# EAGLE board sd2snes20 (EAGLE 4.15)
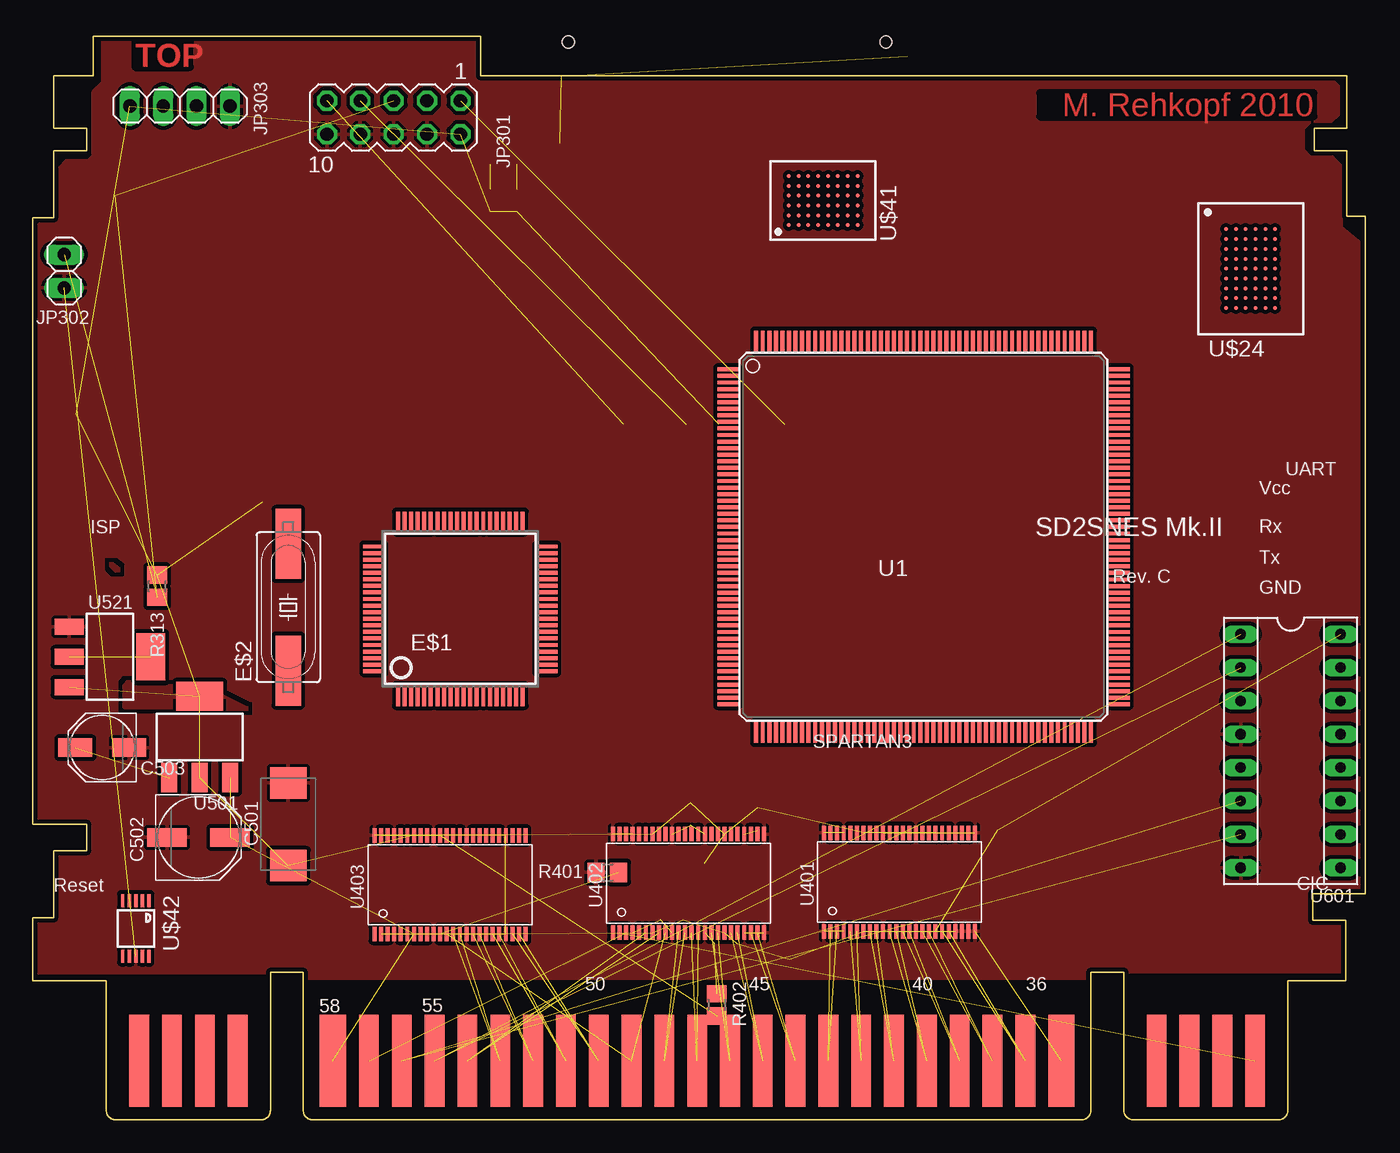
[diagram p0: board, top side]
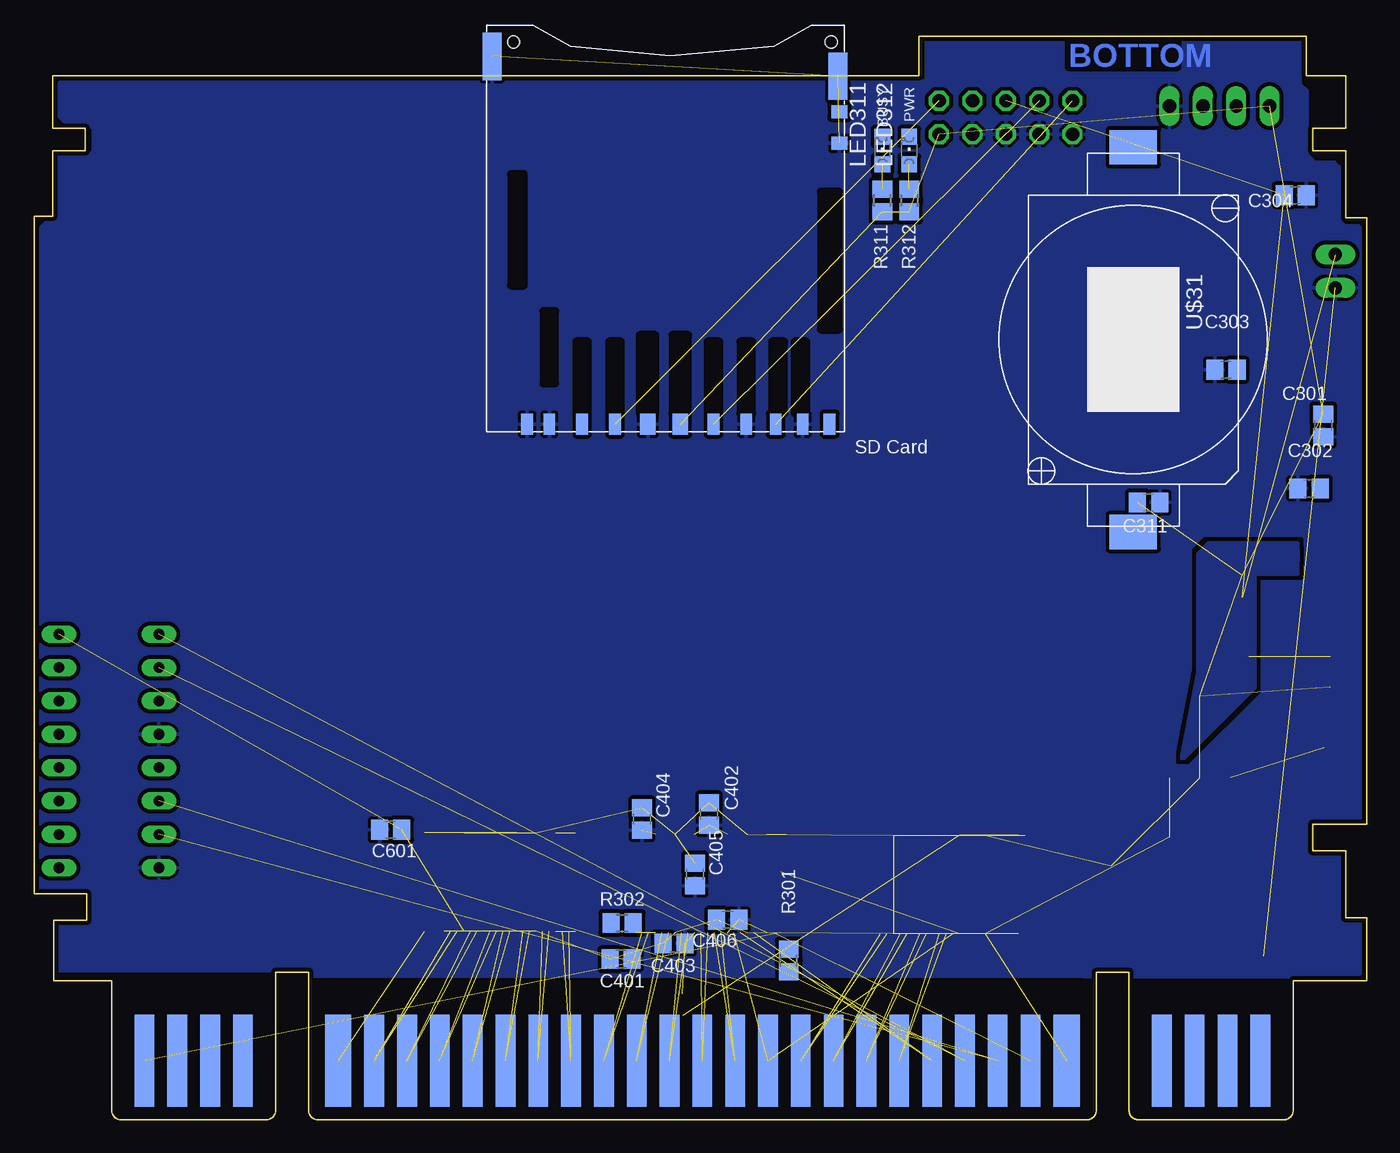
[diagram p1: board, bottom side, seen from below]

Size 101.5 x 82.5 mm. Coordinates in mm from the lower left corner, seen from the top.
Copper layers (1*16): Top 0.035mm / dielectric 1mm / Bottom 0.035mm
Design rules "myBilex DRU": minimum track width 0.1mm, minimum drill 0.1mm, track to track 0.1mm, track to pad 0.1mm, pad to pad 0.1mm, via to via 0.1mm, smd to smd 0.1mm, copper to edge 10mil, drill to drill 8mil, minimum pad ring 10mil, minimum via ring 0.1mm, stop-mask expansion 4mil, vias tented up to drill 0mil, thermal gap 10mil

## Footprints (pad centres in the part's own frame; a part is rotated, then mirrored left to right if it is on the bottom)
C0805 = smd 1.3 x 1.5: 1 -0.85,0; 2 0.85,0
SMC_D = smd 2.4 x 2.8: + -3.15,0; - 3.15,0
PANASONIC_D = smd 3 x 1.4: + 2.4,0; - -2.4,0
PANASONIC_C = smd 2.6 x 1.4: + 2.05,0; - -2.05,0
SQFP-S-12X12-80 = smd 0.3 x 1.6: 1 -4.75,-6.6; 2 -4.25,-6.6; 3 -3.75,-6.6; 4 -3.25,-6.6; 5 -2.75,-6.6; 6 -2.25,-6.6; 7 -1.75,-6.6; 8 -1.25,-6.6; 9 -0.75,-6.6; 10 -0.25,-6.6; 11 0.25,-6.6; 12 0.75,-6.6; 13 1.25,-6.6; 14 1.75,-6.6; 15 2.25,-6.6; 16 2.75,-6.6; 17 3.25,-6.6; 18 3.75,-6.6; 19 4.25,-6.6; 20 4.75,-6.6; 41 4.75,6.6; 42 4.25,6.6; 43 3.75,6.6; 44 3.25,6.6; 45 2.75,6.6; 46 2.25,6.6; 47 1.75,6.6; 48 1.25,6.6; 49 0.75,6.6; 50 0.25,6.6; 51 -0.25,6.6; 52 -0.75,6.6; 53 -1.25,6.6; 54 -1.75,6.6; 55 -2.25,6.6; 56 -2.75,6.6; 57 -3.25,6.6; 58 -3.75,6.6; 59 -4.25,6.6; 60 -4.75,6.6 | smd 1.6 x 0.3: 21 6.6,-4.75; 22 6.6,-4.25; 23 6.6,-3.75; 24 6.6,-3.25; 25 6.6,-2.75; 26 6.6,-2.25; 27 6.6,-1.75; 28 6.6,-1.25; 29 6.6,-0.75; 30 6.6,-0.25; 31 6.6,0.25; 32 6.6,0.75; 33 6.6,1.25; 34 6.6,1.75; 35 6.6,2.25; 36 6.6,2.75; 37 6.6,3.25; 38 6.6,3.75; 39 6.6,4.25; 40 6.6,4.75; 61 -6.6,4.75; 62 -6.6,4.25; 63 -6.6,3.75; 64 -6.6,3.25; 65 -6.6,2.75; 66 -6.6,2.25; 67 -6.6,1.75; 68 -6.6,1.25; 69 -6.6,0.75; 70 -6.6,0.25; 71 -6.6,-0.25; 72 -6.6,-0.75; 73 -6.6,-1.25; 74 -6.6,-1.75; 75 -6.6,-2.25; 76 -6.6,-2.75; 77 -6.6,-3.25; 78 -6.6,-3.75; 79 -6.6,-4.25; 80 -6.6,-4.75
HC49UP = smd 5.334 x 1.93: 1 -4.826,0; 2 4.826,0
JAE-SG5S009V1A = smd 0.9 x 1.6: 1 6.875,14.44; 2 4.375,14.44; 5 -3.125,14.44; 6 -5.625,14.44; 7 -7.875,14.44; 8 -9.925,14.44; 9 9.375,14.44; CARD_DET1 -11.975,14.44; CARD_DET2 11.075,14.44 | smd 1.2 x 1.6: 3 1.875,14.44; 4 -0.6,14.44 | smd 1.45 x 3.6: GND -12.625,-12.06; GND@1 13.725,-13.56 | smd 1.25 x 1: WP_1 -12.725,-9.36; WP_2 -12.725,-6.96 | hole 0.9: -12.1,-14.66; 12.1,-14.66
MA05-2 = drill 1.016 octagon: 1 -5.08,-1.27; 2 -5.08,1.27; 3 -2.54,-1.27; 4 -2.54,1.27; 5 0,-1.27; 6 0,1.27; 7 2.54,-1.27; 8 2.54,1.27; 9 5.08,-1.27; 10 5.08,1.27
1X02 = drill 1.016 long: 1 -1.27,0; 2 1.27,0
1X04 = drill 1.016 long: 1 -3.81,0; 2 -1.27,0; 3 1.27,0; 4 3.81,0
CHIPLED_0805 = smd 1.2 x 1.2: A 0,-1.05; C 0,1.05
R0805 = smd 1.3 x 1.5: 1 -0.85,0; 2 0.85,0
PQ208 = smd 1.6 x 0.3: P1 -14.9,12.75; P2 -14.9,12.25; P3 -14.9,11.75; P4 -14.9,11.25; P5 -14.9,10.75; P6 -14.9,10.25; P7 -14.9,9.75; P8 -14.9,9.25; P9 -14.9,8.75; P10 -14.9,8.25; P11 -14.9,7.75; P12 -14.9,7.25; P13 -14.9,6.75; P14 -14.9,6.25; P15 -14.9,5.75; P16 -14.9,5.25; P17 -14.9,4.75; P18 -14.9,4.25; P19 -14.9,3.75; P20 -14.9,3.25; P21 -14.9,2.75; P22 -14.9,2.25; P23 -14.9,1.75; P24 -14.9,1.25; P25 -14.9,0.75; P26 -14.9,0.25; P27 -14.9,-0.25; P28 -14.9,-0.75; P29 -14.9,-1.25; P30 -14.9,-1.75; P31 -14.9,-2.25; P32 -14.9,-2.75; P33 -14.9,-3.25; P34 -14.9,-3.75; P35 -14.9,-4.25; P36 -14.9,-4.75; P37 -14.9,-5.25; P38 -14.9,-5.75; P39 -14.9,-6.25; P40 -14.9,-6.75; P41 -14.9,-7.25; P42 -14.9,-7.75; P43 -14.9,-8.25; P44 -14.9,-8.75; P45 -14.9,-9.25; P46 -14.9,-9.75; P47 -14.9,-10.25; P48 -14.9,-10.75; P49 -14.9,-11.25; P50 -14.9,-11.75; P51 -14.9,-12.25; P52 -14.9,-12.75; P105 14.9,-12.75; P106 14.9,-12.25; P107 14.9,-11.75; P108 14.9,-11.25; P109 14.9,-10.75; P110 14.9,-10.25; P111 14.9,-9.75; P112 14.9,-9.25; P113 14.9,-8.75; P114 14.9,-8.25; P115 14.9,-7.75; P116 14.9,-7.25; P117 14.9,-6.75; P118 14.9,-6.25; P119 14.9,-5.75; P120 14.9,-5.25; P121 14.9,-4.75; P122 14.9,-4.25; P123 14.9,-3.75; P124 14.9,-3.25; P125 14.9,-2.75; P126 14.9,-2.25; P127 14.9,-1.75; P128 14.9,-1.25; P129 14.9,-0.75; P130 14.9,-0.25; P131 14.9,0.25; P132 14.9,0.75; P133 14.9,1.25; P134 14.9,1.75; P135 14.9,2.25; P136 14.9,2.75; P137 14.9,3.25; P138 14.9,3.75; P139 14.9,4.25; P140 14.9,4.75; P141 14.9,5.25; P142 14.9,5.75; P143 14.9,6.25; P144 14.9,6.75; P145 14.9,7.25; P146 14.9,7.75; P147 14.9,8.25; P148 14.9,8.75; P149 14.9,9.25; P150 14.9,9.75; P151 14.9,10.25; P152 14.9,10.75; P153 14.9,11.25; P154 14.9,11.75; P155 14.9,12.25; P156 14.9,12.75 | smd 0.3 x 1.6: P53 -12.75,-14.9; P54 -12.25,-14.9; P55 -11.75,-14.9; P56 -11.25,-14.9; P57 -10.75,-14.9; P58 -10.25,-14.9; P59 -9.75,-14.9; P60 -9.25,-14.9; P61 -8.75,-14.9; P62 -8.25,-14.9; P63 -7.75,-14.9; P64 -7.25,-14.9; P65 -6.75,-14.9; P66 -6.25,-14.9; P67 -5.75,-14.9; P68 -5.25,-14.9; P69 -4.75,-14.9; P70 -4.25,-14.9; P71 -3.75,-14.9; P72 -3.25,-14.9; P73 -2.75,-14.9; P74 -2.25,-14.9; P75 -1.75,-14.9; P76 -1.25,-14.9; P77 -0.75,-14.9; P78 -0.25,-14.9; P79 0.25,-14.9; P80 0.75,-14.9; P81 1.25,-14.9; P82 1.75,-14.9; P83 2.25,-14.9; P84 2.75,-14.9; P85 3.25,-14.9; P86 3.75,-14.9; P87 4.25,-14.9; P88 4.75,-14.9; P89 5.25,-14.9; P90 5.75,-14.9; P91 6.25,-14.9; P92 6.75,-14.9; P93 7.25,-14.9; P94 7.75,-14.9; P95 8.25,-14.9; P96 8.75,-14.9; P97 9.25,-14.9; P98 9.75,-14.9; P99 10.25,-14.9; P100 10.75,-14.9; P101 11.25,-14.9; P102 11.75,-14.9; P103 12.25,-14.9; P104 12.75,-14.9; P157 12.75,14.9; P158 12.25,14.9; P159 11.75,14.9; P160 11.25,14.9; P161 10.75,14.9; P162 10.25,14.9; P163 9.75,14.9; P164 9.25,14.9; P165 8.75,14.9; P166 8.25,14.9; P167 7.75,14.9; P168 7.25,14.9; P169 6.75,14.9; P170 6.25,14.9; P171 5.75,14.9; P172 5.25,14.9; P173 4.75,14.9; P174 4.25,14.9; P175 3.75,14.9; P176 3.25,14.9; P177 2.75,14.9; P178 2.25,14.9; P179 1.75,14.9; P180 1.25,14.9; P181 0.75,14.9; P182 0.25,14.9; P183 -0.25,14.9; P184 -0.75,14.9; P185 -1.25,14.9; P186 -1.75,14.9; P187 -2.25,14.9; P188 -2.75,14.9; P189 -3.25,14.9; P190 -3.75,14.9; P191 -4.25,14.9; P192 -4.75,14.9; P193 -5.25,14.9; P194 -5.75,14.9; P195 -6.25,14.9; P196 -6.75,14.9; P197 -7.25,14.9; P198 -7.75,14.9; P199 -8.25,14.9; P200 -8.75,14.9; P201 -9.25,14.9; P202 -9.75,14.9; P203 -10.25,14.9; P204 -10.75,14.9; P205 -11.25,14.9; P206 -11.75,14.9; P207 -12.25,14.9; P208 -12.75,14.9
TSSOP48 = smd 0.3 x 1.1: 1 -5.75,-3.75; 2 -5.25,-3.75; 3 -4.75,-3.75; 4 -4.25,-3.75; 5 -3.75,-3.75; 6 -3.25,-3.75; 7 -2.75,-3.75; 8 -2.25,-3.75; 9 -1.75,-3.75; 10 -1.25,-3.75; 11 -0.75,-3.75; 12 -0.25,-3.75; 13 0.25,-3.75; 14 0.75,-3.75; 15 1.25,-3.75; 16 1.75,-3.75; 17 2.25,-3.75; 18 2.75,-3.75; 19 3.25,-3.75; 20 3.75,-3.75; 21 4.25,-3.75; 22 4.75,-3.75; 23 5.25,-3.75; 24 5.75,-3.75; 25 5.75,3.75; 26 5.25,3.75; 27 4.75,3.75; 28 4.25,3.75; 29 3.75,3.75; 30 3.25,3.75; 31 2.75,3.75; 32 2.25,3.75; 33 1.75,3.75; 34 1.25,3.75; 35 0.75,3.75; 36 0.25,3.75; 37 -0.25,3.75; 38 -0.75,3.75; 39 -1.25,3.75; 40 -1.75,3.75; 41 -2.25,3.75; 42 -2.75,3.75; 43 -3.25,3.75; 44 -3.75,3.75; 45 -4.25,3.75; 46 -4.75,3.75; 47 -5.25,3.75; 48 -5.75,3.75
SOT223 = smd 1.219 x 2.235: 1 -2.311,-3.099; 2 0,-3.099; 3 2.311,-3.099 | smd 3.6 x 2.2: TAB 0,3.099
SOCKED-16 = drill 0.813 long: 1 -8.89,-3.81; 2 -6.35,-3.81; 3 -3.81,-3.81; 4 -1.27,-3.81; 5 1.27,-3.81; 6 3.81,-3.81; 7 6.35,-3.81; 8 8.89,-3.81; 9 8.89,3.81; 10 6.35,3.81; 11 3.81,3.81; 12 1.27,3.81; 13 -1.27,3.81; 14 -3.81,3.81; 15 -6.35,3.81; 16 -8.89,3.81
VFBGA54 = smd 0.3 x 0.3: A1 -1.875,3; A2 -1.125,3; A3 -0.375,3; A4 0.375,3; A5 1.125,3; A6 1.875,3; B1 -1.875,2.25; B2 -1.125,2.25; B3 -0.375,2.25; B4 0.375,2.25; B5 1.125,2.25; B6 1.875,2.25; C1 -1.875,1.5; C2 -1.125,1.5; C3 -0.375,1.5; C4 0.375,1.5; C5 1.125,1.5; C6 1.875,1.5; D1 -1.875,0.75; D2 -1.125,0.75; D3 -0.375,0.75; D4 0.375,0.75; D5 1.125,0.75; D6 1.875,0.75; E1 -1.875,0; E2 -1.125,0; E3 -0.375,0; E4 0.375,0; E5 1.125,0; E6 1.875,0; F1 -1.875,-0.75; F2 -1.125,-0.75; F3 -0.375,-0.75; F4 0.375,-0.75; F5 1.125,-0.75; F6 1.875,-0.75; G1 -1.875,-1.5; G2 -1.125,-1.5; G3 -0.375,-1.5; G4 0.375,-1.5; G5 1.125,-1.5; G6 1.875,-1.5; H1 -1.875,-2.25; H2 -1.125,-2.25; H3 -0.375,-2.25; H4 0.375,-2.25; H5 1.125,-2.25; H6 1.875,-2.25; J1 -1.875,-3; J2 -1.125,-3; J3 -0.375,-3; J4 0.375,-3; J5 1.125,-3; J6 1.875,-3
KZH20SMD = smd 2.6 x 3.6: + 14.65,0; - -14.65,0
SNESCART_EXT = smd 1.5 x 7: 1 -42.5,-0.5; 2 -40,-0.5; 3 -37.5,-0.5; 4 -35,-0.5; 6 -25,-0.5; 7 -22.5,-0.5; 8 -20,-0.5; 9 -17.5,-0.5; 10 -15,-0.5; 11 -12.5,-0.5; 12 -10,-0.5; 13 -7.5,-0.5; 14 -5,-0.5; 15 -2.5,-0.5; 16 0,-0.5; 17 2.5,-0.5; 18 5,-0.5; 19 7.5,-0.5; 20 10,-0.5; 21 12.5,-0.5; 22 15,-0.5; 23 17.5,-0.5; 24 20,-0.5; 25 22.5,-0.5; 26 25,-0.5; 28 35,-0.5; 29 37.5,-0.5; 30 40,-0.5; 31 42.5,-0.5 | smd 2 x 7: 5 -27.75,-0.5; 27 27.75,-0.5 | smd 1.5 x 7 bottom: 32 -42.5,-0.5; 33 -40,-0.5; 34 -37.5,-0.5; 35 -35,-0.5; 37 -25,-0.5; 38 -22.5,-0.5; 39 -20,-0.5; 40 -17.5,-0.5; 41 -15,-0.5; 42 -12.5,-0.5; 43 -10,-0.5; 44 -7.5,-0.5; 45 -5,-0.5; 46 -2.5,-0.5; 47 0,-0.5; 48 2.5,-0.5; 49 5,-0.5; 50 7.5,-0.5; 51 10,-0.5; 52 12.5,-0.5; 53 15,-0.5; 54 17.5,-0.5; 55 20,-0.5; 56 22.5,-0.5; 57 25,-0.5; 59 35,-0.5; 60 37.5,-0.5; 61 40,-0.5; 62 42.5,-0.5 | smd 2 x 7 bottom: 36 -27.75,-0.5; 58 27.75,-0.5
VFBGA48-.29 = smd 0.292 x 0.292: A1 -1.875,2.625; A2 -1.125,2.625; A3 -0.375,2.625; A4 0.375,2.625; A5 1.125,2.625; A6 1.875,2.625; B1 -1.875,1.875; B2 -1.125,1.875; B3 -0.375,1.875; B4 0.375,1.875; B5 1.125,1.875; B6 1.875,1.875; C1 -1.875,1.125; C2 -1.125,1.125; C3 -0.375,1.125; C4 0.375,1.125; C5 1.125,1.125; C6 1.875,1.125; D1 -1.875,0.375; D2 -1.125,0.375; D3 -0.375,0.375; D4 0.375,0.375; D5 1.125,0.375; D6 1.875,0.375; E1 -1.875,-0.375; E2 -1.125,-0.375; E3 -0.375,-0.375; E4 0.375,-0.375; E5 1.125,-0.375; E6 1.875,-0.375; F1 -1.875,-1.125; F2 -1.125,-1.125; F3 -0.375,-1.125; F4 0.375,-1.125; F5 1.125,-1.125; F6 1.875,-1.125; G1 -1.875,-1.875; G2 -1.125,-1.875; G3 -0.375,-1.875; G4 0.375,-1.875; G5 1.125,-1.875; G6 1.875,-1.875; H1 -1.875,-2.625; H2 -1.125,-2.625; H3 -0.375,-2.625; H4 0.375,-2.625; H5 1.125,-2.625; H6 1.875,-2.625
MSOP10 = smd 0.25 x 1: 1 -1,-2.113; 2 -0.5,-2.113; 3 0,-2.113; 4 0.5,-2.113; 5 1,-2.113; 6 1,2.113; 7 0.5,2.113; 8 0,2.113; 9 -0.5,2.113; 10 -1,2.113

## Placement (x,y rotation side)
C301  100n  [C0805]  3.31,52.88 270 bottom
C302  22p  [C0805]  4.4,48.08 0 bottom
C303  22p  [C0805]  10.72,57.12 0 bottom
C304  100n  [C0805]  5.44,70.41 0 bottom
C311  100n  [C0805]  16.61,47.01 0 bottom
C401  100n  [C0805]  56.8,12.24 0 bottom
C402  100n  [C0805]  50.09,23.29 270 bottom
C403  100n  [C0805]  52.76,13.43 0 bottom
C404  100n  [C0805]  55.2,22.91 270 bottom
C405  100n  [C0805]  51.16,18.69 90 bottom
C406  100n  [C0805]  48.67,15.24 0 bottom
C501  T_100u  [SMC_D]  19.46,22.5 90 top
C502  100u/16V  [PANASONIC_D]  12.63,21.51 0 top
C503  22u/16V  [PANASONIC_C]  5.29,28.34 180 top
C601  100n  [C0805]  74.35,22.09 180 bottom
E$1  [SQFP-S-12X12-80]  32.57,38.91 0 top
E$2  [HC49UP]  19.46,39.04 90 top
J301  JAE-SG5S009V1A  [JAE-SG5S009V1A]  52.89,67.41 180 bottom
JP301  [MA05-2]  27.49,76.32 180 top
JP302  [1X02]  2.39,64.61 270 top
JP303  [1X04]  11.2,77.19 0 top
LED311  RED  [CHIPLED_0805]  36.88,73.81 0 bottom
LED312  GREEN  [CHIPLED_0805]  34.85,73.81 0 bottom
R301  270  [R0805]  44.02,12.14 90 bottom
R302  270  [R0805]  56.72,14.98 0 bottom
R311  100  [R0805]  36.88,70 90 bottom
R312  100  [R0805]  34.85,70 270 bottom
R313  10k  [R0805]  9.48,40.64 90 top
R401  10k  [R0805]  43.77,18.84 0 top
R402  10k  [R0805]  52.1,8.76 270 top
U1  XC3S200PQ208  [PQ208]  67.85,44.4 0 top
U401  74ALVC164245DGG  [TSSOP48]  66.02,18.11 0 top
U402  74ALVC164245DGG  [TSSOP48]  49.94,18 0 top
U403  74ALVC164245DGG  [TSSOP48]  31.78,17.9 0 top
U501  LM1117MPX-ADJ  [SOT223]  12.7,29.16 0 top
U521  LM1117MPX-ADJ  [SOT223]  5.87,35.25 270 top
U601  CIC  [SOCKED-16]  95.81,28.09 270 top
U$24  MT45W8MW16BGX  [VFBGA54]  92.76,64.82 0 top
U$31  2032  [KZH20SMD]  17.78,59.41 270 bottom
U$40  [SNESCART_EXT]  50.6,5 0 bottom
U$41  MT45W4MW16.29  [VFBGA48-.29]  60.2,70 90 top
U$42  [MSOP10]  7.85,14.58 180 top

## Library data of the parts
C301-C304 C311 C401-C406 C501-C503 C601 R301 R302 R311-R313 R401 R402 = rcl
E$1 = ref-packages
E$2 = crystal
J301 = sdcard
JP301 = con-lstb
JP302 JP303 = pinhead
LED311 LED312 = led
U1 = xilinx_spartan3_virtex4_and_5
U401-U403 = misc-74
U501 U521 = lm1117
U601 = ic-package
U$24 U$41 = psram-micron
U$31 = kzh20_lithium_batterie_holder
U$40 = snescart
U$42 = cirrus-3

## Nets
+1.25V: U521.2 U521.TAB
+3V3: C301.1 C311.1 C402.1 C404.1 C405.2 C501.+ J301.4 JP301.2 JP303.1 R311.1 R312.2 R313.2 U401.31 U401.42 U402.31 U402.42 U403.31 U403.42 U501.2 U501.TAB U521.3
+5V: C401.1 C403.1 C406.1 C502.+ C601.1 U401.7 U401.18 U402.7 U402.18 U403.7 U403.18 U501.3 U601.16 U$40.27 U$40.58
CCLK: R301.1
CCLK_AVR: R301.2
GND: C301.2 C302.1 C303.1 C304.2 C311.2 C401.2 C402.2 C403.2 C404.2 C405.1 C406.2 C501.- C502.- C503.- C601.2 J301.3 J301.6 J301.8 J301.9 J301.CARD_DET2 J301.GND J301.GND@1 J301.WP_2 JP301.4 JP301.6 JP301.8 JP301.10 JP302.2 JP303.4 R401.1 R402.1 U401.1 U401.4 U401.10 U401.15 U401.21 U401.22 U401.23 U401.24 U401.25 U401.28 U401.34 U401.39 U401.45 U401.48 U402.4 U402.10 U402.15 U402.21 U402.24 U402.25 U402.28 U402.34 U402.39 U402.45 U402.48 U403.4 U403.10 U403.15 U403.21 U403.28 U403.34 U403.39 U403.45 U403.48 U521.1 U601.4 U601.8 U$40.5 U$40.36 U$42.8
IRQ_DIR: U403.1
MISO: J301.7 JP301.9
MOSI: J301.2 JP301.1
N$1: U601.1 U$40.24
N$2: U601.2 U$40.55
N$3: U601.6 U$40.56
N$4: U601.7 U$40.25
N$5: C302.2
N$6: C303.2
N$7: LED311.A R311.2
N$8: C304.1 JP301.5 JP302.1 R313.1
N$9: LED312.A R312.1
N$10: R401.2 U403.2 U403.3 U403.5 U403.6 U403.8 U403.9 U403.11
N$11: LED312.C
N$12: R402.2 U403.38 U403.40 U403.41 U403.43 U403.44 U403.46 U403.47
N$13: J301.WP_1
N$14: LED311.C
N$108: C503.+ U501.1
PROG_B: R302.1
PROG_B_AVR: R302.2
RESET_DIR: U402.1
RXD: JP303.2
SCK: J301.5 JP301.7
SD_DET: J301.CARD_DET1
SD_SS: J301.1
SNES_/IRQ: U403.37
SNES_/IRQ_EXT: U403.12 U$40.18
SNES_/RD: U402.43
SNES_/RD_EXT: U402.6 U$40.23
SNES_/RESET_EXT: U$40.26
SNES_/ROMSEL: U402.40
SNES_/ROMSEL_EXT: U402.9 U$40.49
SNES_/WR: U402.41
SNES_/WR_EXT: U402.8 U$40.54
SNES_A0: U402.37
SNES_A0_EXT: U402.12 U$40.17
SNES_A1: U402.35
SNES_A1_EXT: U402.14 U$40.16
SNES_A2: U402.32
SNES_A2_EXT: U402.17 U$40.15
SNES_A3: U402.29
SNES_A3_EXT: U402.20 U$40.14
SNES_A4: U402.26
SNES_A4_EXT: U402.23 U$40.13
SNES_A5: U401.46
SNES_A5_EXT: U401.3 U$40.12
SNES_A6: U401.43
SNES_A6_EXT: U401.6 U$40.11
SNES_A7: U401.40
SNES_A7_EXT: U401.9 U$40.10
SNES_A8: U401.37
SNES_A8_EXT: U401.12 U$40.9
SNES_A9: U401.35
SNES_A9_EXT: U401.14 U$40.8
SNES_A10: U401.32
SNES_A10_EXT: U401.17 U$40.7
SNES_A11: U401.29
SNES_A11_EXT: U401.20 U$40.6
SNES_A12: U401.30
SNES_A12_EXT: U401.19 U$40.37
SNES_A13: U401.33
SNES_A13_EXT: U401.16 U$40.38
SNES_A14: U401.36
SNES_A14_EXT: U401.13 U$40.39
SNES_A15: U401.38
SNES_A15_EXT: U401.11 U$40.40
SNES_A16: U401.41
SNES_A16_EXT: U401.8 U$40.41
SNES_A17: U401.44
SNES_A17_EXT: U401.5 U$40.42
SNES_A18: U401.47
SNES_A18_EXT: U401.2 U$40.43
SNES_A19: U402.27
SNES_A19_EXT: U402.22 U$40.44
SNES_A20: U402.30
SNES_A20_EXT: U402.19 U$40.45
SNES_A21: U402.33
SNES_A21_EXT: U402.16 U$40.46
SNES_A22: U402.36
SNES_A22_EXT: U402.13 U$40.47
SNES_A23: U402.38
SNES_A23_EXT: U402.11 U$40.48
SNES_CPU_CLK: U402.46
SNES_CPU_CLK_EXT: U402.3 U$40.57
SNES_D0: U403.26
SNES_D0_EXT: U403.23 U$40.19
SNES_D1: U403.29
SNES_D1_EXT: U403.20 U$40.20
SNES_D2: U403.32
SNES_D2_EXT: U403.17 U$40.21
SNES_D3: U403.35
SNES_D3_EXT: U403.14 U$40.22
SNES_D4: U403.27
SNES_D4_EXT: U403.22 U$40.50
SNES_D5: U403.30
SNES_D5_EXT: U403.19 U$40.51
SNES_D6: U403.33
SNES_D6_EXT: U403.16 U$40.52
SNES_D7: U403.36
SNES_D7_EXT: U403.13 U$40.53
SNES_DATABUS_/OE: U403.25
SNES_DATABUS_DIR: U403.24
SNES_REFRESH: U402.44
SNES_REFRESH_EXT: U402.5
SNES_SYS_CLK: U402.47
SYS_CLK_EXT: U402.2 U$40.1
TXD: JP303.3
VA: U$42.9

## Tracks (layer width: path | path; a pad name or v marks a point on that pad's centre or on a via)
+1.25V  (1 unrouted)
+3V3  (20 unrouted)
  pour Bottom (isolate 0.406): 12.8,34.03 12.8,43.07 12.02,43.86 5.31,43.86 5.29,42.92 5.31,42.11 5.31,41.6 8.61,41.6 8.61,32.94 14.02,27.53
  pour Top (isolate 0.406): 10.14,31.44 16.28,31.31 11.99,33.42 7.39,33.42 7.04,33.07 7.04,31.44
  pour Top (isolate 0.406): 5.69,42.52 6.3,41.88 6.56,41.88
+5V  (14 unrouted)
GND  (29 unrouted)
  pour Top (isolate 0.305, rank 6): 0.21,11.2 20.35,11.2 20.35,10.79 80.29,10.79 80.29,11.27 101.25,11.27 101.25,66.72 99.72,67.97 99.72,72.61 99.04,73.3 97.36,73.3 96.8,73.86 96.8,75.46 97.39,76.04 98.96,76.04 99.47,76.55 99.47,78.71 99.19,78.99 33.91,78.99 33.91,82.14 5.29,82.14 5.29,79.02 4.58,78.3 4.58,73.43 4.17,73.02 2.52,73.02 2.01,72.51 2.01,68.58 1.63,68.2 0.49,68.2 0.21,67.92
  pour Bottom (isolate 0.305, rank 6): 4.52,78.38 4.52,73.53 3.97,72.97 2.47,72.97 1.98,72.49 1.98,68.42 1.68,68.12 0.64,68.12 0.33,67.81 0.33,11.25 0.71,10.87 21.52,10.87 80.32,10.89 80.32,11.3 100.41,11.3 101.04,11.93 101.04,67.97 100.49,68.53 100.08,68.53 99.77,68.83 99.77,73.28 99.44,73.61 97.23,73.61 97.01,73.83 97.01,75.38 97.54,75.92 99.16,75.92 99.62,76.37 99.62,78.91 99.37,79.17 33.54,79.17 33.54,82.17 5.04,82.17 5.04,78.9
MISO  (1 unrouted)
MOSI  (1 unrouted)
N$1  (1 unrouted)
N$2  (1 unrouted)
N$3  (1 unrouted)
N$4  (1 unrouted)
N$7  (1 unrouted)
N$8  (3 unrouted)
N$9  (1 unrouted)
N$10  (7 unrouted)
N$12  (7 unrouted)
N$108  (1 unrouted)
SCK  (1 unrouted)
SNES_/IRQ_EXT  (1 unrouted)
SNES_/RD_EXT  (1 unrouted)
SNES_/ROMSEL_EXT  (1 unrouted)
SNES_/WR_EXT  (1 unrouted)
SNES_A0_EXT  (1 unrouted)
SNES_A1_EXT  (1 unrouted)
SNES_A2_EXT  (1 unrouted)
SNES_A3_EXT  (1 unrouted)
SNES_A4_EXT  (1 unrouted)
SNES_A5_EXT  (1 unrouted)
SNES_A6_EXT  (1 unrouted)
SNES_A7_EXT  (1 unrouted)
SNES_A8_EXT  (1 unrouted)
SNES_A9_EXT  (1 unrouted)
SNES_A10_EXT  (1 unrouted)
SNES_A11_EXT  (1 unrouted)
SNES_A12_EXT  (1 unrouted)
SNES_A13_EXT  (1 unrouted)
SNES_A14_EXT  (1 unrouted)
SNES_A15_EXT  (1 unrouted)
SNES_A16_EXT  (1 unrouted)
SNES_A17_EXT  (1 unrouted)
SNES_A18_EXT  (1 unrouted)
SNES_A19_EXT  (1 unrouted)
SNES_A20_EXT  (1 unrouted)
SNES_A21_EXT  (1 unrouted)
SNES_A22_EXT  (1 unrouted)
SNES_A23_EXT  (1 unrouted)
SNES_CPU_CLK_EXT  (1 unrouted)
SNES_D0_EXT  (1 unrouted)
SNES_D1_EXT  (1 unrouted)
SNES_D2_EXT  (1 unrouted)
SNES_D3_EXT  (1 unrouted)
SNES_D4_EXT  (1 unrouted)
SNES_D5_EXT  (1 unrouted)
SNES_D6_EXT  (1 unrouted)
SNES_D7_EXT  (1 unrouted)
SYS_CLK_EXT  (1 unrouted)

## Text on the board
Top: TOP | M. Rehkopf 2010
Bottom: BOTTOM
tPlace: !! This side to BACK of SNES !! | UART | ISP | Reset
tNames: Vcc | SD2SNES Mk.II | Rx | Tx | Rev. C | GND | SPARTAN3 | CIC | 50 | 45 | 40 | 36 | 58 | 55
bNames: PWR | BUSY | SD Card
_tsilk: !! This side to BACK of SNES !! | C521 | U521 | R521 | U511 | R512 | R511 | C511 | U101 | UART | Vcc | JP301 | ISP | SD2SNES Mk.I | Rx | 1 | U301 | Rev. C | Tx | P53 | P52 | GND | P47 | P46 | JP303 | R313 | X301 | P44 | 10 | C501 | AVR | R402 | SPARTAN3 | C503 | C502 | U601 | JP302 | CIC | Reset | R503 | R502 | R501 | U501 | U403 | U402 | U401 | R401 | 50 | 45 | 40 | 36 | 58 | 55
_bsilk: PWR | BUSY | 1 | 1 | 1 | 1 | 4x16M SRAM | R312 | R311 | 48 | 48 | 48 | 48 | U201 | U202 | U203 | U204 | C201 | C202 | C203 | C204 | SD Card | C107 | C311 | C102 | C106 | C302 | C303 | C301 | C104 | C101 | C103 | C105 | R301 | R302 | C304 | C601 | C405 | C404 | C402 | C406 | C403 | C401